# EAGLE board blinkm_xbee_adapter (EAGLE 5.09)
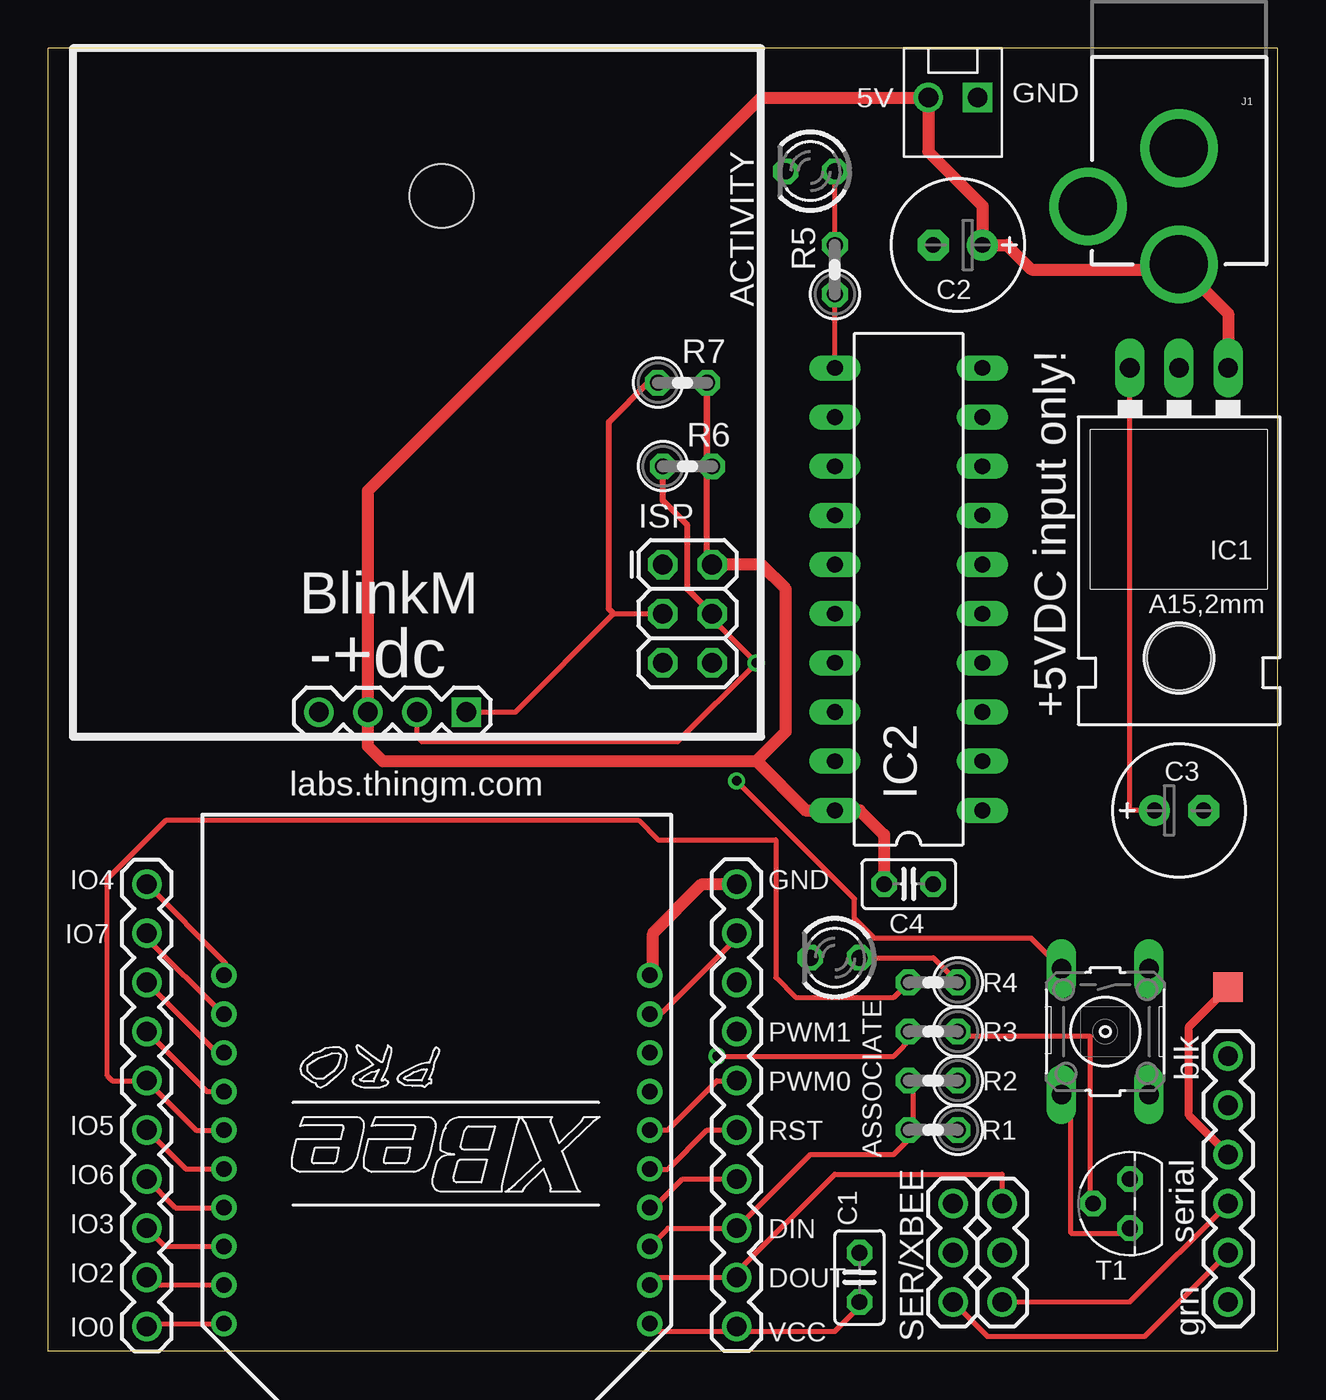
[diagram p0: board, top side]
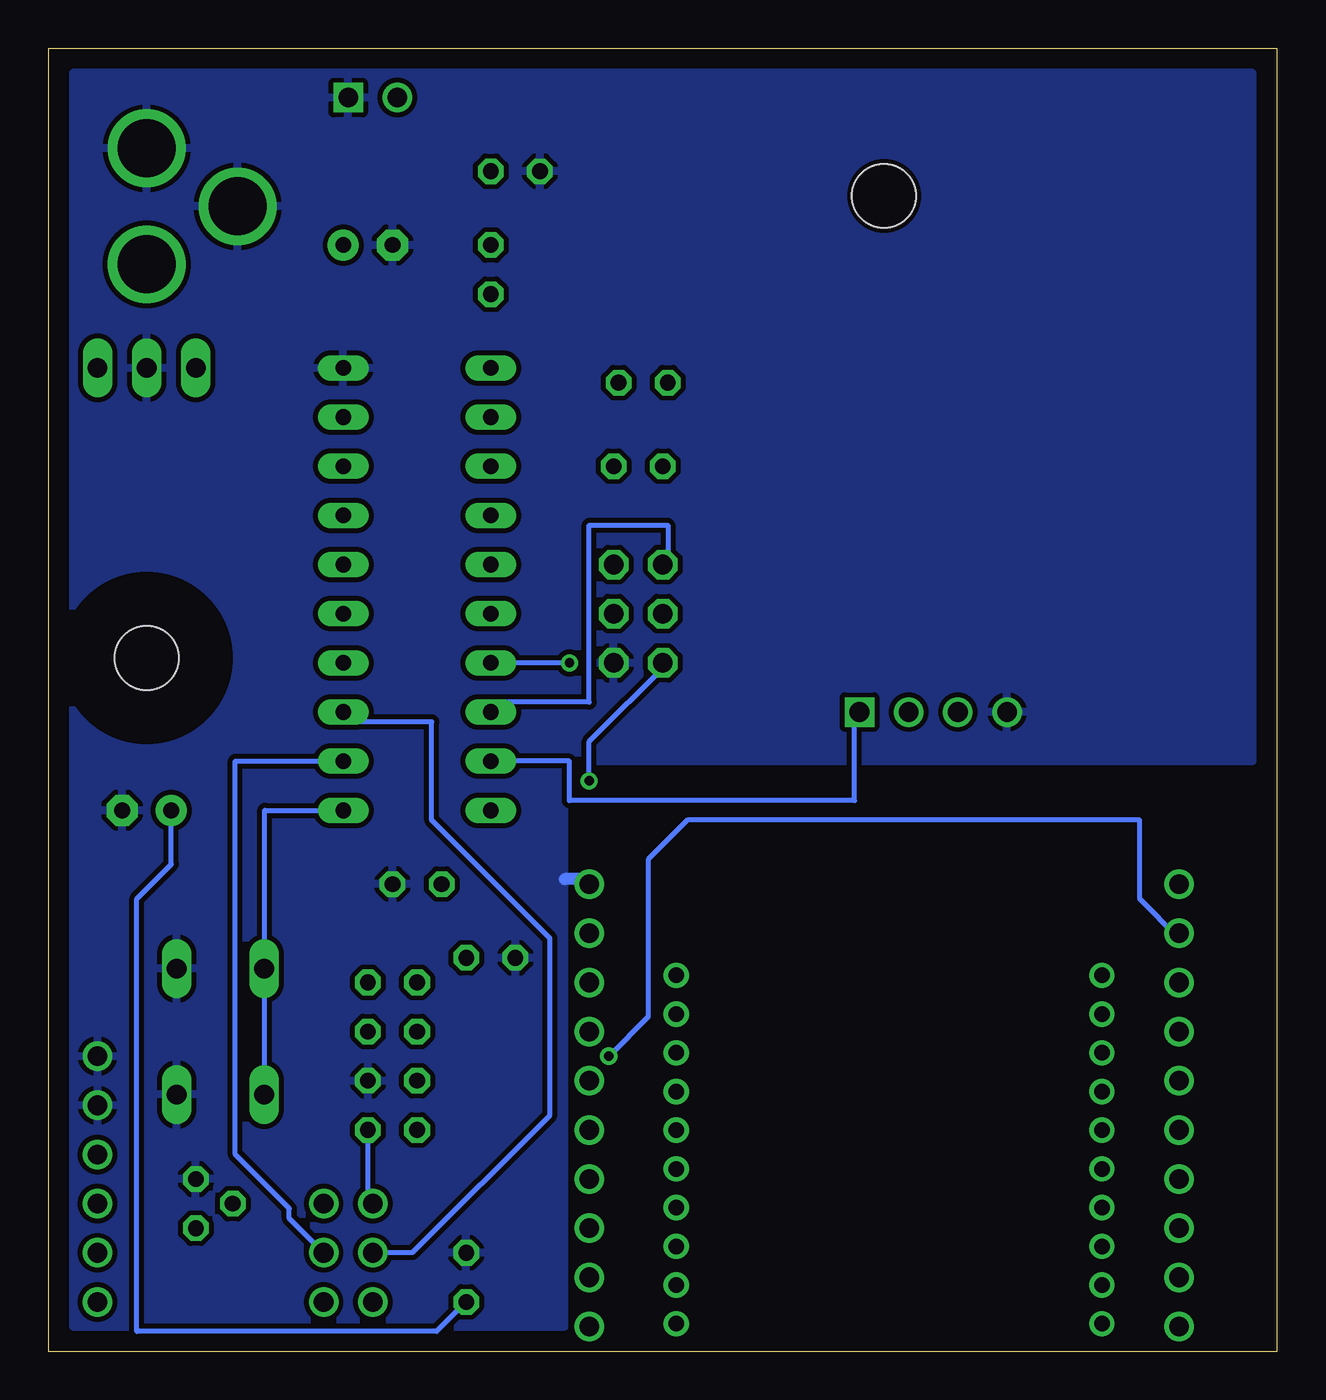
[diagram p1: board, bottom side, seen from below]

Size 63.5 x 67.31 mm. Coordinates in mm from the lower left corner, seen from the top.
Outline: 63.5,39.37 63.5,39.12
Outline: 63.5,39.12 63.5,67.31 0,67.31 0,0 63.5,0 63.5,39.12
Copper layers (1*16): Top 0.0356mm / dielectric 1.5011mm / Bottom 0.0356mm
Design rules "boarduino": minimum track width 10mil, minimum drill 19mil, track to track 10mil, track to pad 10mil, pad to pad 10mil, via to via 10mil, smd to smd 0mil, copper to edge 10mil, drill to drill 8mil, minimum pad ring 10mil, minimum via ring 8mil, stop-mask expansion 4mil, vias tented up to drill 0mil, thermal gap 10mil
Net classes: 1 power: width 0.61 mm
tRestrict: 4 lines
bRestrict: 4 lines

## Footprints (pad centres in the part's own frame; a part is rotated, then mirrored left to right if it is on the bottom)
LED3MM = drill 0.813 octagon: A -1.27,0; K 1.27,0
C025-025X050 = drill 0.813 octagon: 1 -1.27,0; 2 1.27,0
E2,5-7 = drill 0.813 pad 1.6 round: + -1.27,0 | drill 0.813 pad 1.6 octagon: - 1.27,0
78XXL = drill 1.016 long: GND 0,-3.81; IN -2.54,-3.81; OUT 2.54,-3.81 | hole 3.302: 0,11.176
DIL20 = drill 0.813 long: 1 -11.43,-3.81; 2 -8.89,-3.81; 3 -6.35,-3.81; 4 -3.81,-3.81; 5 -1.27,-3.81; 6 1.27,-3.81; 7 3.81,-3.81; 8 6.35,-3.81; 9 8.89,-3.81; 10 11.43,-3.81; 11 11.43,3.81; 12 8.89,3.81; 13 6.35,3.81; 14 3.81,3.81; 15 1.27,3.81; 16 -1.27,3.81; 17 -3.81,3.81; 18 -6.35,3.81; 19 -8.89,3.81; 20 -11.43,3.81
2X3 = drill 1.016 octagon: 1 0,0; 2 0,2.54; 3 2.54,0; 4 2.54,2.54; 5 5.08,0; 6 5.08,2.54
POWER_JACK_PTH = drill 2.997 round: GND 0,7.7; GNDBREAK 4.7,10.7; PWR 0,13.7
MOLEX-1X2 = drill 1.016 square: 1 0,0 | drill 1.016 round: 2 2.54,0
1X03 = drill 1.016 round: 1 0,0; 2 2.54,0; 3 5.08,0
1X10 = drill 1.016 round: 1 0,0; 2 2.54,0; 3 5.08,0; 4 7.62,0; 5 10.16,0; 6 12.7,0; 7 15.24,0; 8 17.78,0; 9 20.32,0; 10 22.86,0
1X04 = drill 1.016 square: 1 0,0 | drill 1.016 round: 2 2.54,0; 3 5.08,0; 4 7.62,0
1X06 = drill 1.016 round: 1 0,0; 2 2.54,0; 3 5.08,0; 4 7.62,0; 5 10.16,0; 6 12.7,0
0207/2V = drill 0.813 octagon: 1 -1.27,0; 2 1.27,0
B3F-10XX = drill 1.016 long: 1 -3.251,2.261; 2 3.251,2.261; 3 -3.251,-2.261; 4 3.251,-2.261
TO92 = drill 0.813 octagon: 1 1.27,0; 2 0,1.905; 3 -1.27,0
STAND-OFF = hole 3.302: 0,0
PAD.03X.05 = smd 1.524 x 1.524: P$1 0,0
XBEE-PRO = drill 0.8 pad 1.27 round: 1 -11,9; 2 -11,7; 3 -11,5; 4 -11,3; 5 -11,1; 6 -11,-1; 7 -11,-3; 8 -11,-5; 9 -11,-7; 10 -11,-9; 11 11,-9; 12 11,-7; 13 11,-5; 14 11,-3; 15 11,-1; 16 11,1; 17 11,3; 18 11,5; 19 11,7; 20 11,9

## Placement (x,y rotation side)
ACTIVITY  [LED3MM]  39.37,60.96 180 top
ASSOCIATE  [LED3MM]  40.64,20.32 180 top
C1  100n  [C025-025X050]  41.91,3.81 90 top
C2  10u  [E2,5-7]  46.99,57.15 180 top
C3  10u  [E2,5-7]  58.42,27.94 0 top
C4  100n  [C025-025X050]  44.45,24.13 0 top
IC1  MC332269T-3.3G  [78XXL]  58.42,46.99 180 top
IC2  ATtiny2313  [DIL20]  44.45,39.37 90 top
ISP  AVR_SPI_PRG_6PTH  [2X3]  31.75,40.64 270 top
J1  POWER_JACKPTH  [POWER_JACK_PTH]  58.42,69.85 180 top
JP1  [MOLEX-1X2]  48.01,64.77 180 top
JP2  [1X03]  49.28,7.62 270 top
JP4  [1X10]  5.08,1.27 90 top
JP5  [1X04]  21.59,33.02 180 top
JP6  [1X03]  46.74,7.62 270 top
JP7  [1X10]  35.56,24.13 270 top
JP11  [1X06]  60.96,15.24 270 top
R1  10k  [0207/2V]  45.72,11.43 180 top
R2  15k  [0207/2V]  45.72,13.97 180 top
R3  1k  [0207/2V]  45.72,16.51 180 top
R4  1k  [0207/2V]  45.72,19.05 180 top
R5  1k  [0207/2V]  40.64,55.88 90 top
R6  4.7k  [0207/2V]  33.02,45.72 0 top
R7  4.7k  [0207/2V]  32.77,50.04 0 top
S1  [B3F-10XX]  54.61,16.51 270 top
T1  BC547B  [TO92]  55.88,7.62 90 top
U$1  [STAND-OFF]  20.32,59.69 0 top
U$2  TEST-POINT3X5  [PAD.03X.05]  60.96,18.8 0 top
XB1  XBEE-PRO  [XBEE-PRO]  20.07,10.41 180 top

## Library data of the parts
ACTIVITY ASSOCIATE = led
C1-C4 R1-R7 = rcl
IC1 = v-reg
IC2 = atmel
ISP J1 JP1 JP2 JP4-JP7 JP11 U$1 U$2 = SparkFun-2-20-08
S1 = switch-omron
T1 = transistor-npn
XB1 = maxstream

## Nets
3: JP7.8 R1.2 R2.2 XB1.3
4: JP7.7 XB1.4
5: JP7.6 XB1.5
6: JP7.5 XB1.6
7: JP7.4
8: JP7.3
9: JP7.2 XB1.9
11: JP4.10 XB1.11
12: JP4.9 R3.2 XB1.12
13: JP4.8 XB1.13
14: JP4.7 XB1.14
15: JP4.6 R4.2 XB1.15
16: JP4.5 XB1.16
17: JP4.4 XB1.17
18: JP4.3 XB1.18
19: JP4.2 XB1.19
20: JP4.1 XB1.20
+3V3: C1.1 C3.+ IC1.OUT JP7.10 XB1.1
+5V [power]: C2.+ C4.1 IC1.IN IC2.20 ISP.2 J1.PWR JP1.2 JP5.3 R6.2 R7.2
ATI: IC2.2 JP2.2
ATO: IC2.3 JP6.2
GND [power]: ACTIVITY.K ASSOCIATE.K C1.2 C2.- C3.- C4.2 IC1.GND IC2.10 ISP.6 J1.GND J1.GNDBREAK JP1.1 JP5.4 JP7.1 JP11.1 JP11.2 R2.1 S1.1 S1.2 T1.1 XB1.10
MISO: IC2.18 ISP.1
MOSI: IC2.17 ISP.4 JP5.2 R6.1
N$1: ASSOCIATE.A R4.1
N$2: ACTIVITY.A R5.2
N$6: R3.1 T1.2
N$33: IC2.11 R5.1
RESET: IC2.1 ISP.5 S1.3 S1.4 T1.3
RXD: JP2.3 JP11.4
SCK: IC2.19 ISP.3 JP5.1 R7.1
TXD: JP6.3 JP11.5
USB5V: JP11.3 U$2.P$1
XBI: JP6.1 R1.1
XBO: JP2.1 JP7.9 XB1.2

## Tracks (layer width: path | path; a pad name or v marks a point on that pad's centre or on a via)
3
  Top 0.254: 44.7,11.18 44.7,14.22 R2.2 | 44.7,11.18 43.69,10.16 39.37,10.16 JP7.8 32,6.35 XB1.3 | 44.7,11.18 R1.2 | XB1.3 30.99,5.33 | XB1.3
4
  Top 0.254: XB1.4 31.19,7.41 31.24,7.37 32.77,8.89 JP7.7
5
  Top 0.254: JP7.6 34.04,11.43 32,9.4 30.99,9.4 31,9.41 XB1.5
6
  Top 0.254: JP7.5 34.54,13.97 32,11.43 31.24,11.43 31.23,11.41 XB1.6
9
  Top 0.254: JP7.2 35.56,21.34 31.75,17.53 30.99,17.53 30.99,17.49 XB1.9
11
  Top 0.254: 9.14,19.34 9.14,19.3 | XB1.11 9.14,19.34 | JP4.10 9.14,20.07 9.14,19.34
12  (via drill 0.48)
  Top 0.254: v34.54,15.24 43.69,15.24 44.7,16.26 R3.2 | JP4.9 5.08,21.34 9,17.41 XB1.12
  Bottom 0.254: v34.54,15.24 32.51,17.27 32.51,25.4 30.48,27.43 7.11,27.43 7.11,23.37 5.08,21.34 JP4.9
13
  Top 0.254: XB1.13 8.72,15.41 JP4.8
14
  Top 0.254: XB1.14 8.18,13.41 JP4.7
15
  Top 0.254: 44.7,19.3 R4.2 43.69,18.29 38.61,18.29 37.59,19.3 37.59,26.42 31.5,26.42 30.48,27.43 6.1,27.43 3.05,24.38 3.05,14.22 3.3,13.97 JP4.6 7.64,11.41 XB1.15
16
  Top 0.254: XB1.16 7.1,9.41 JP4.5
17
  Top 0.254: XB1.17 6.56,7.41 JP4.4
18
  Top 0.254: XB1.18 6.02,5.41 JP4.3
19
  Top 0.254: XB1.19 5.48,3.41 JP4.2
20
  Top 0.254: XB1.20 5.22,1.41 JP4.1
+3V3
  Top 0.254: 35.56,1.02 31.5,1.02 31.07,1.45 | 35.56,1.02 40.64,1.02 41.91,2.29 C1.1 | 35.56,1.02 JP7.10 | IC1.OUT 55.88,27.94 C3.+ | 31.07,1.45 30.99,1.52 | XB1.1 31.07,1.45
  Bottom 0.254: C1.1 43.43,1.02 58.93,1.02 58.93,23.37 57.15,25.15 C3.+
+5V
  Top 0.305: R6.2 34.04,45.97 R7.2 34.04,40.89 ISP.2
  Top 0.61: C4.1 43.18,26.67 41.91,27.94 IC2.20 39.12,27.94 36.58,30.48 | IC1.IN 60.96,53.61 J1.PWR 58.42,55.88 50.8,55.88 49.53,57.15 C2.+ 48.26,59.18 45.47,61.98 JP1.2 36.83,64.77 16.51,44.45 JP5.3 16.51,31.24 17.27,30.48 36.58,30.48 | ISP.2 36.83,40.64 38.1,39.37 38.1,32 36.58,30.48
ATI
  Bottom 0.254: JP2.2 51.05,6.86 51.05,7.37 53.85,10.16 53.85,30.48 IC2.2
ATO
  Bottom 0.254: IC2.3 47.75,32.51 43.69,32.51 43.69,27.43 37.59,21.34 37.59,12.19 44.7,5.08 JP6.2
GND
  Top 0.61: JP7.1 33.78,24.13 31.24,21.59 31.24,19.3 31.13,19.41 XB1.10
  Bottom 0.61: JP7.1 35.56,24.38 36.83,24.38
  pour Bottom (isolate 0.254): 1.27,30.48 1.27,66.04 62.23,66.04 62.23,1.27 36.83,1.27 36.83,30.48
MISO
  Bottom 0.254: ISP.1 31.5,40.64 31.5,42.67 35.56,42.67 35.56,33.53 40.13,33.53 IC2.18
MOSI  (via drill 0.48)
  Top 0.254: JP5.2 19.05,31.75 19.3,31.5 32.51,31.5 v36.58,35.56 34.29,37.85 ISP.4
  Top 0.305: R6.1 31.75,43.94 33.02,42.67 33.02,39.37 ISP.4
  Bottom 0.254: v36.58,35.56 IC2.17
N$1
  Top 0.254: 41.66,20.32 ASSOCIATE.A 45.72,20.32 R4.1
N$2
  Top 0.254: ACTIVITY.A R5.2 40.64,56.9
N$6
  Top 0.254: T1.2 53.85,7.62 53.85,16.26 46.74,16.26 R3.1
N$33
  Top 0.254: IC2.11 R5.1 40.64,54.86
RESET  (via drill 0.48)
  Top 0.254: T1.3 55.88,6.1 52.83,6.1 52.83,12.7 52.32,13.21 52.32,13.23 S1.4 | v35.56,29.46 41.66,23.37 41.66,22.35 42.67,21.34 50.8,21.34 52.32,19.81 52.32,19.79 S1.3
  Bottom 0.254: v35.56,29.46 35.56,31.5 31.5,35.56 ISP.5 | IC2.1 52.32,27.94 52.32,19.79 S1.3 52.32,19.74 52.32,13.23 | 52.32,13.23 52.32,13.26 S1.4 52.32,13.23 | 52.32,13.23 52.32,13.21
RXD
  Top 0.254: JP11.4 55.88,2.54 JP2.3
SCK
  Top 0.254: ISP.3 29.21,38.1 24.13,33.02 JP5.1
  Top 0.305: R7.1 30.99,50.04 28.96,48.01 28.96,38.35 29.21,38.1
  Bottom 0.254: JP5.1 21.84,32.77 21.84,28.45 36.58,28.45 36.58,30.48 IC2.19
TXD
  Top 0.254: JP11.5 56.64,0.76 48.51,0.76 JP6.3
USB5V
  Top 0.406: JP11.3 58.93,12.19 58.93,16.76 U$2.P$1
XBI
  Bottom 0.254: R1.1 46.99,7.87 JP6.1
XBO
  Top 0.254: JP2.1 49.28,9.14 40.64,9.14 35.56,4.06 JP7.9 31.5,3.81 31.07,3.38 | 31.07,3.38 30.99,3.3 | XB1.2 31.07,3.38

## Text on the board
tPlace: BlinkM | -+dc | +5VDC input only! | labs.thingm.com | blk | serial | grn
tNames: 5V | GND | IO4 | GND | IO7 | PWM1 | PWM0 | IO5 | RST | IO6 | IO3 | DIN | IO2 | DOUT | IO0 | SER/XBEE | VCC